# Altium PCB Anchor.PcbDoc
Units mm, origin at the board's own origin, x right, y up, seen from the top; angles counter-clockwise.
Board outline 48 x 36 mm, 2 copper layers (Top Layer, Bottom Layer); 50 components, 36 nets, 187 pads, 45 vias.
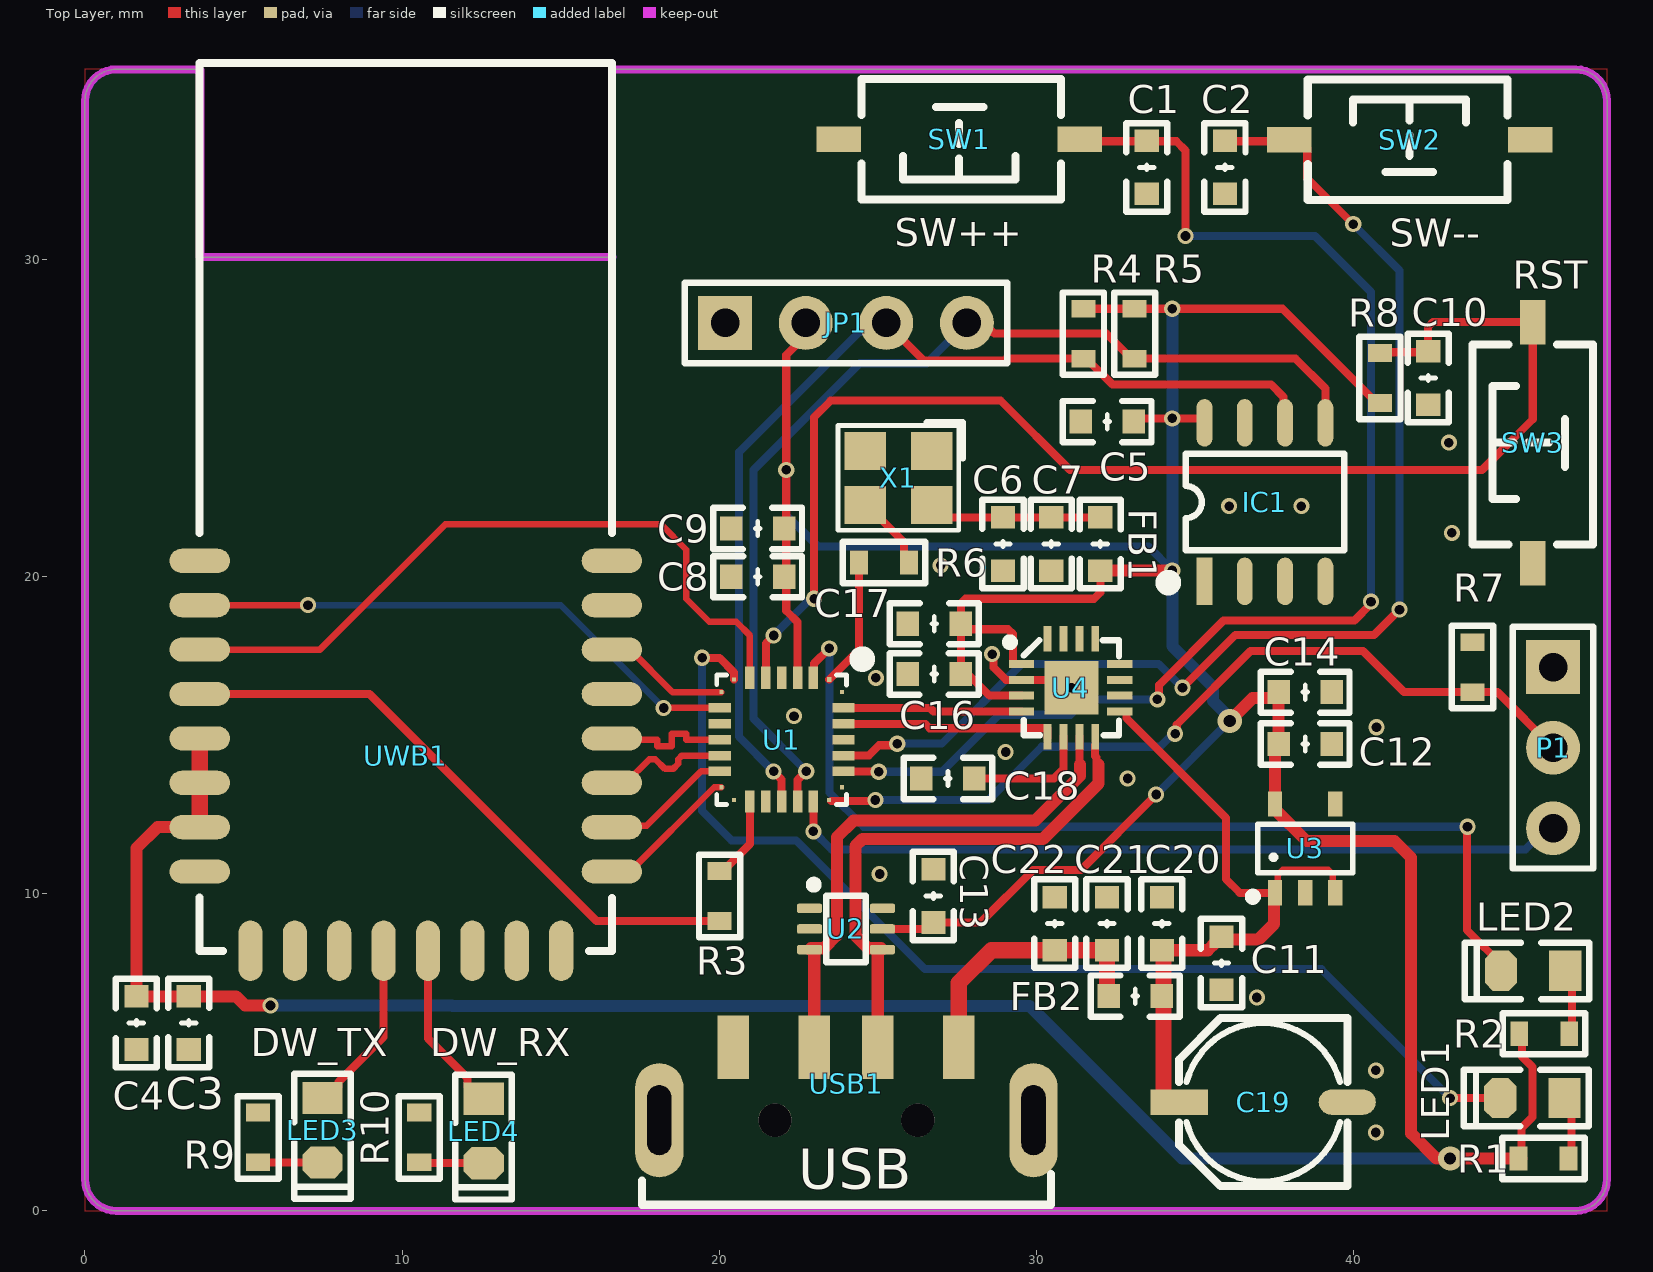
[diagram p0: Top Layer view]
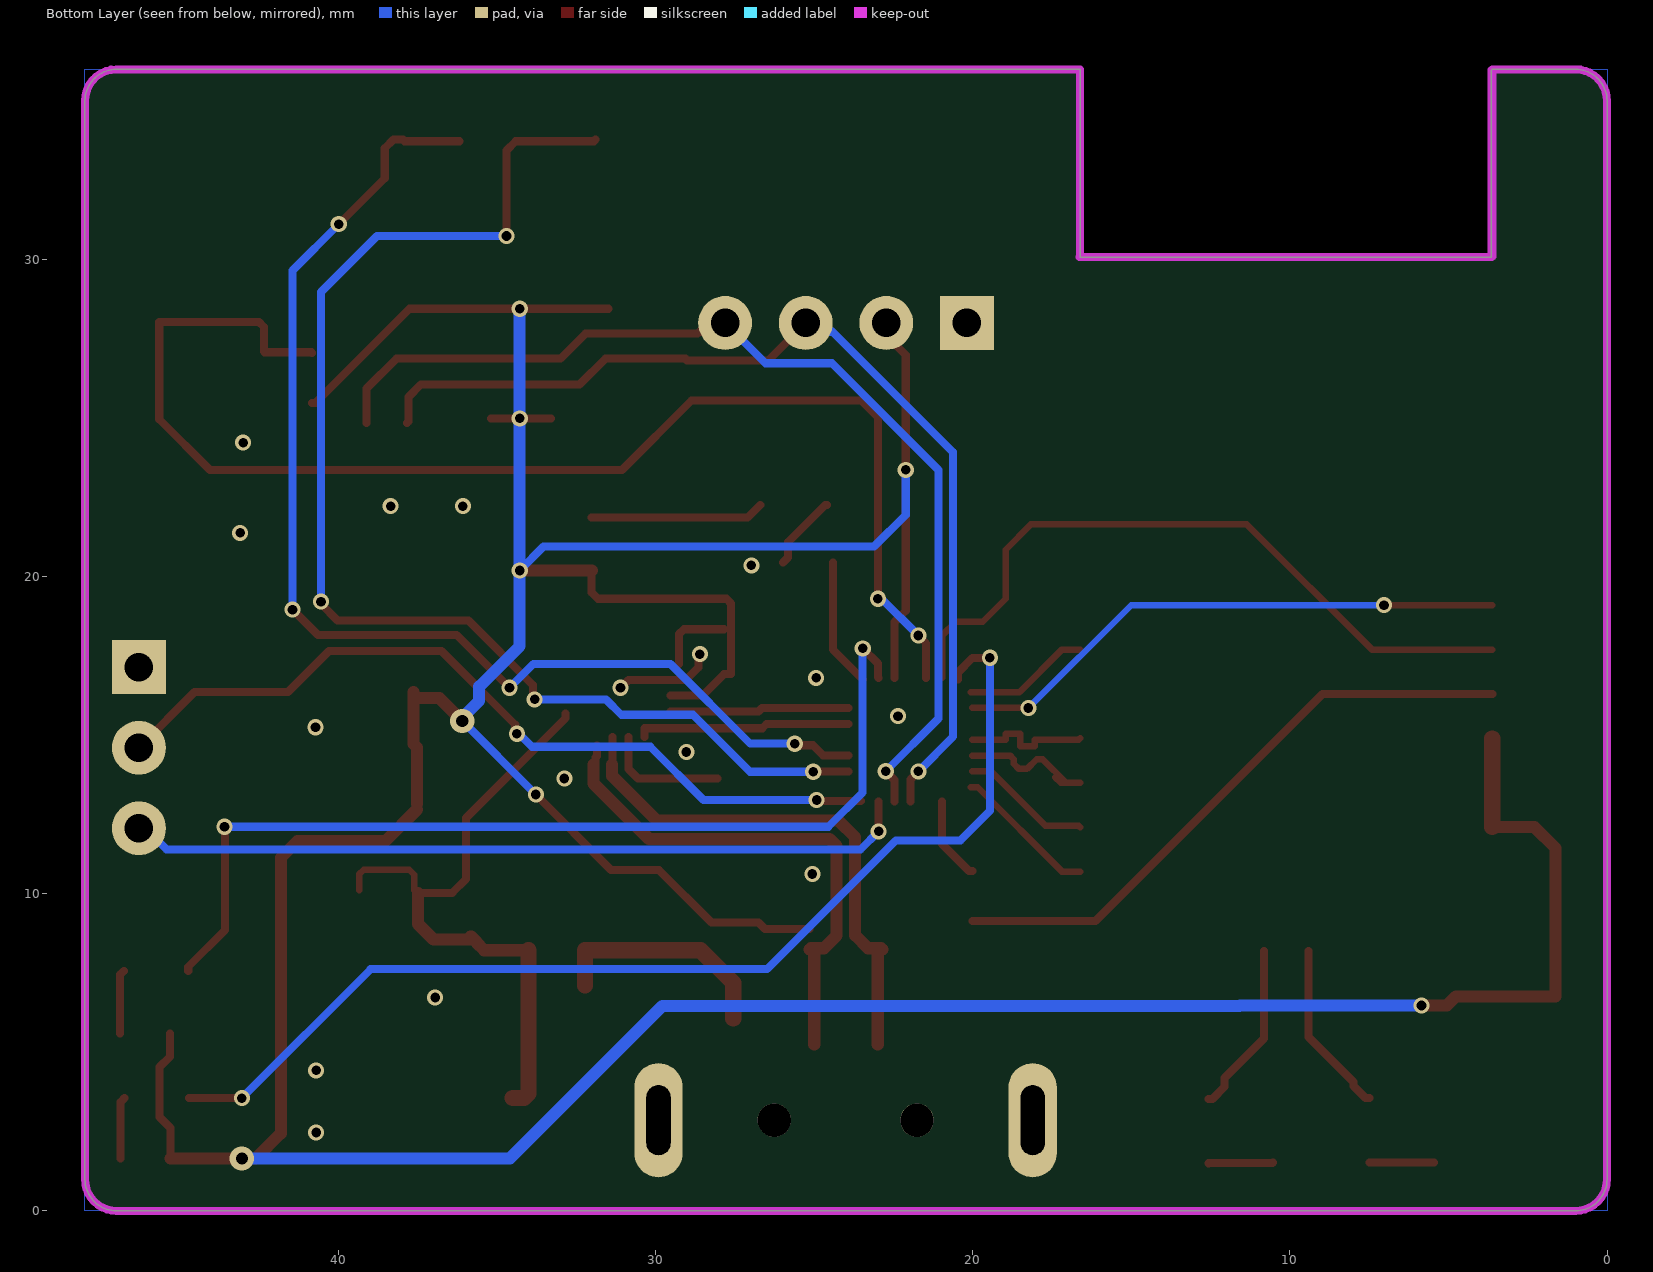
[diagram p1: Bottom Layer view, seen from below]

## Layer stack, top to bottom
Top Solder: solder mask 0.0102, Solder Resist, Dk 3.5
Top Layer: signal copper 0.0356
Dielectric 1: dielectric 0.32, FR-4, Dk 4.8
Bottom Layer: signal copper 0.0356
Bottom Solder: solder mask 0.0102, Solder Resist, Dk 3.5

## Board outline
0,1 0,35 cw(c1,35) 1,36 3.619,36 3.645,35.974 3.645,30.077 16.619,30.077 16.619,36 47,36 cw(c47,35) 48,35 48,1 cw(c47,1) 47,0 1,0 cw(c1,1)

## Design rules (kind name [scope] priority, off if disabled: settings)
AssemblyTestPointUsage [All] p0: scope1count=1 scope1_0_kind=Board scope1_0_value=Board scope2count=1 scope2_0_kind=Board scope2_0_value=Board commentlength=0
AssemblyTestpoint [All] p0: scope1count=1 scope1_0_kind=Board scope1_0_value=Board scope2count=1 scope2_0_kind=Board scope2_0_value=Board commentlength=0
Clearance [All] p0: scope1count=1 scope1_0_kind=Board scope1_0_value=Board scope2count=1 scope2_0_kind=Board scope2_0_value=Board commentlength=0 gap=0.203
Clearance Frame_Shrink [All] p0 off: scope1count=1 scope1_0_kind=Layer scope1_0_value=TOP scope2count=1 scope2_0_kind=Board scope2_0_value=Board commentlength=48 gap=0.381 // Protel DXP Scope 2 Expression Was: InPolygon
Clearance Chip_Pin [All] p0: scope1count=1 scope1_0_kind=Component scope1_0_value=BK1','USBC1','U1 scope2count=1 scope2_0_kind=Board scope2_0_value=Board commentlength=0 gap=0.152
Clearance RF_Pour_Clearance [All] p0 off: scope1count=1 scope1_0_kind=NetClass scope1_0_value=RF scope2count=1 scope2_0_kind=Board scope2_0_value=Board commentlength=48 gap=0.381 // Protel DXP Scope 2 Expression Was: InPolygon
Clearance RF_Pour_Clearance [InNetClass('RF') vs InPolygon] p1: gap=0.381 ignorepadtopadclearanceinfootprint=TRUE
Clearance Chip_Pin [InComponent('BK1','USBC1','U1')] p2: gap=0.152 ignorepadtopadclearanceinfootprint=TRUE
Clearance Frame_Shrink [OnLayer('Keep-Out Layer') vs InPolygon] p3: gap=0.381 ignorepadtopadclearanceinfootprint=FALSE
Clearance [All] p4: gap=0.203 ignorepadtopadclearanceinfootprint=TRUE
ComponentClearance [All] p0: scope1count=1 scope1_0_kind=Board scope1_0_value=Board scope2count=1 scope2_0_kind=Board scope2_0_value=Board commentlength=0 gap=0.254 collisioncheckmode=3
DiffPairsRouting [All] p0: scope1count=1 scope1_0_kind=Board scope1_0_value=Board scope2count=1 scope2_0_kind=Board scope2_0_value=Board commentlength=0
DiffPairsRouting [All] p1: maxlimit=0.254 minlimit=0.254 mostfreqgap=0.254 toplayer_minwidth=0.203 toplayer_maxwidth=0.381 toplayer_prefwidth=0.203 bottomlayer_minwidth=0.203 bottomlayer_maxwidth=0.381 bottomlayer_prefwidth=0.203 maxuncoupledlength=12.7
FabricationTestPointUsage [All] p0: scope1count=1 scope1_0_kind=Board scope1_0_value=Board scope2count=1 scope2_0_kind=Board scope2_0_value=Board commentlength=0 valid=0 allowmultiple=FALSE
FabricationTestpoint [All] p0: scope1count=1 scope1_0_kind=Board scope1_0_value=Board scope2count=1 scope2_0_kind=Board scope2_0_value=Board commentlength=0 side=3 testpointundercomponent=TRUE minsize=1.016 maxsize=2.54 preferedsize=1.524 minholesize=0 maxholesize=1.016 preferedholesize=0.813 testpointgrid=0.025
FanoutControl Fanout_Default [All] p0: scope1count=1 scope1_0_kind=Board scope1_0_value=Board scope2count=1 scope2_0_kind=Board scope2_0_value=Board commentlength=30 // Fanout_Default (Default Rule)
FanoutControl Fanout_Small [All] p0 off: scope1count=1 scope1_0_kind=Board scope1_0_value=Board scope2count=1 scope2_0_kind=Board scope2_0_value=Board commentlength=84 // Protel DXP Scope 1 Expression Was: (CompPinCount < 5)   Fanout_Small (Default Rule)
FanoutControl Fanout_SOIC [All] p0 off: scope1count=1 scope1_0_kind=Board scope1_0_value=Board scope2count=1 scope2_0_kind=Board scope2_0_value=Board commentlength=71 // Protel DXP Scope 1 Expression Was: IsSOIC   Fanout_SOIC (Default Rule)
FanoutControl Fanout_LCC [All] p0 off: scope1count=1 scope1_0_kind=Board scope1_0_value=Board scope2count=1 scope2_0_kind=Board scope2_0_value=Board commentlength=69 // Protel DXP Scope 1 Expression Was: IsLCC   Fanout_LCC (Default Rule)
FanoutControl Fanout_BGA [All] p0 off: scope1count=1 scope1_0_kind=Board scope1_0_value=Board scope2count=1 scope2_0_kind=Board scope2_0_value=Board commentlength=69 // Protel DXP Scope 1 Expression Was: IsBGA   Fanout_BGA (Default Rule)
Height [All] p0: scope1count=1 scope1_0_kind=Board scope1_0_value=Board scope2count=1 scope2_0_kind=Board scope2_0_value=Board commentlength=0
HoleSize [All] p0: scope1count=1 scope1_0_kind=Board scope1_0_value=Board scope2count=1 scope2_0_kind=Board scope2_0_value=Board commentlength=0 absolutevalues=TRUE maxlimit=2.54 minlimit=0.025 maxpercent=80.000 minpercent=20.000
HoleToHoleClearance [All] p0: scope1count=1 scope1_0_kind=Board scope1_0_value=Board scope2count=1 scope2_0_kind=Board scope2_0_value=Board commentlength=0
LayerPairs [All] p0: scope1count=1 scope1_0_kind=Board scope1_0_value=Board scope2count=1 scope2_0_kind=Board scope2_0_value=Board commentlength=0 enforce=TRUE
MatchedLengths DiffPair_MatchedLengths [All] p0 off: scope1count=1 scope1_0_kind=Board scope1_0_value=Board scope2count=1 scope2_0_kind=Board scope2_0_value=Board commentlength=64 tolerance=25.4 amplitude=5.08 gap=0.508 style=90-Degree // Protel DXP Scope 1 Expression Was: InDifferentialPair ('UD')
MatchedLengths DiffPair_MatchedLengths [InDifferentialPair ('UD')] p1: tolerance=25.4 checknetsindiffpair=FALSE checkdiffpairvsdiffpair=TRUE checkxsignals=TRUE checkothers=TRUE
MinimumSolderMaskSliver [All] p0: scope1count=1 scope1_0_kind=Board scope1_0_value=Board scope2count=1 scope2_0_kind=Board scope2_0_value=Board commentlength=0
MinimumSolderMaskSliver [All] p1: minsoldermaskwidth=0
NetAntennae [All] p0: scope1count=1 scope1_0_kind=Board scope1_0_value=Board scope2count=1 scope2_0_kind=Board scope2_0_value=Board commentlength=0
PasteMaskExpansion [All] p0: scope1count=1 scope1_0_kind=Board scope1_0_value=Board scope2count=1 scope2_0_kind=Board scope2_0_value=Board commentlength=0 expansion=0
PlaneClearance [All] p0: scope1count=1 scope1_0_kind=Board scope1_0_value=Board scope2count=1 scope2_0_kind=Board scope2_0_value=Board commentlength=0 clearance=0.381
PlaneClearance [All] p1: clearance=0.381
PlaneConnect [All] p0: scope1count=1 scope1_0_kind=Board scope1_0_value=Board scope2count=1 scope2_0_kind=Board scope2_0_value=Board commentlength=0 planeconnectstyle=Direct reliefexpansion=0.508 reliefentries=4 reliefconductorwidth=0.381 reliefairgap=0.254
PlaneConnect [All] p1: planeconnectstyle=Direct reliefexpansion=0.508 reliefentries=4 reliefconductorwidth=0.381 reliefairgap=0.254
PolygonConnect [All] p0: scope1count=1 scope1_0_kind=Board scope1_0_value=Board scope2count=1 scope2_0_kind=Board scope2_0_value=Board commentlength=0 connectstyle=Relief reliefconductorwidth=0.381 reliefentries=4 polygonreliefangle="90 Angle"
PolygonConnect PolygonConnect_RF [All] p0: scope1count=1 scope1_0_kind=ComponentClass scope1_0_value=RF_Comp scope2count=1 scope2_0_kind=Board scope2_0_value=Board commentlength=0 connectstyle=Direct reliefconductorwidth=0.254 reliefentries=4 polygonreliefangle="90 Angle"
PolygonConnect PolygonConnect_RF [InComponentClass('RF_Comp')] p1: connectstyle=Direct reliefconductorwidth=0.254 reliefentries=4 polygonreliefangle="90 Angle" airgapwidth=0.254
PolygonConnect [All] p2: thpad.connectstyle=Relief thpad.reliefconductorwidth=0.381 thpad.reliefentries=4 thpad.polygonreliefangle="90 Angle" thpad.airgapwidth=0.254 smdpad.connectstyle=Relief smdpad.reliefconductorwidth=0.254 smdpad.reliefentries=4 smdpad.polygonreliefangle="90 Angle" smdpad.airgapwidth=0.254 via.connectstyle=Direct via.reliefconductorwidth=0.254 via.reliefentries=4 via.polygonreliefangle="90 Angle" via.airgapwidth=0.254
RoutingCorners [All] p0: scope1count=1 scope1_0_kind=Board scope1_0_value=Board scope2count=1 scope2_0_kind=Board scope2_0_value=Board commentlength=0 cornerstyle=45-Degree minsetback=2.54 maxsetback=2.54
RoutingLayers [All] p0: scope1count=1 scope1_0_kind=Board scope1_0_value=Board scope2count=1 scope2_0_kind=Board scope2_0_value=Board commentlength=0 top layer=Automatic bottom layer=Automatic
RoutingPriority [All] p0: scope1count=1 scope1_0_kind=Board scope1_0_value=Board scope2count=1 scope2_0_kind=Board scope2_0_value=Board commentlength=0
RoutingTopology [All] p0: scope1count=1 scope1_0_kind=Board scope1_0_value=Board scope2count=1 scope2_0_kind=Board scope2_0_value=Board commentlength=0 topology=Shortest
RoutingVias [All] p0: scope1count=1 scope1_0_kind=Board scope1_0_value=Board scope2count=1 scope2_0_kind=Board scope2_0_value=Board commentlength=0 holewidth=0.305 width=0.508 viastyle="Through Hole" minholewidth=0.305 minwidth=0.457 maxholewidth=0.635 maxwidth=1.27
RoutingVias [All] p1: holewidth=0.305 width=0.508 viastyle="Through Hole" minholewidth=0.305 minwidth=0.457 maxholewidth=0.635 maxwidth=1.27
ShortCircuit [All] p0: scope1count=1 scope1_0_kind=Board scope1_0_value=Board scope2count=1 scope2_0_kind=Board scope2_0_value=Board commentlength=0 allowed=FALSE
SilkToBoardRegionClearance [All] p0: scope1count=1 scope1_0_kind=Board scope1_0_value=Board scope2count=1 scope2_0_kind=Board scope2_0_value=Board commentlength=0
SilkToSilkClearance [All] p0: scope1count=1 scope1_0_kind=Board scope1_0_value=Board scope2count=1 scope2_0_kind=Board scope2_0_value=Board commentlength=0
SilkToSilkClearance [All] p1: silktosilkclearance=0
SilkToSolderMaskClearance [All] p0 off: scope1count=1 scope1_0_kind=Board scope1_0_value=Board scope2count=1 scope2_0_kind=Board scope2_0_value=Board commentlength=44 // Protel DXP Scope 1 Expression Was: IsPad
SilkToSolderMaskClearance [IsPad] p1: minsilkscreentomaskgap=0 clearancetoexposedcopper=TRUE
SolderMaskExpansion [All] p0: scope1count=1 scope1_0_kind=Board scope1_0_value=Board scope2count=1 scope2_0_kind=Board scope2_0_value=Board commentlength=0 expansion=0.102
SolderMaskExpansion [All] p1: expansion=0.102 istentingtop=FALSE
UnRoutedNet [All] p0: scope1count=1 scope1_0_kind=Board scope1_0_value=Board scope2count=1 scope2_0_kind=Board scope2_0_value=Board commentlength=0
UnpouredPolygon [All] p0: scope1count=1 scope1_0_kind=Board scope1_0_value=Board scope2count=1 scope2_0_kind=Board scope2_0_value=Board commentlength=0
Width [All] p0: scope1count=1 scope1_0_kind=Board scope1_0_value=Board scope2count=1 scope2_0_kind=Board scope2_0_value=Board commentlength=0 maxlimit=0.762 minlimit=0.203 preferedwidth=0.254
Width PWR [All] p0: scope1count=1 scope1_0_kind=NetClass scope1_0_value=PWR scope2count=1 scope2_0_kind=Board scope2_0_value=Board commentlength=0 maxlimit=1.27 minlimit=0.203 preferedwidth=0.381
Width PWR [InNetClass('PWR')] p1: maxlimit=1.27 minlimit=0.203 preferedwidth=0.381
Width [All] p2: maxlimit=0.762 minlimit=0.203 preferedwidth=0.254
24 further rules are at their usual default settings.

## Classes and differential pairs
net class PWR: 3V3 USB_5V VBUS

## Components (designator, comment, footprint, x,y, rotation, side; value= is the part's Value field where it differs from the comment)
C1 "" "C 0603_L" 33.483,32.906 r90 top
C2 "Cap" "C 0603_L" 35.949,32.906 r90 top
C3 "Cap" "C 0603_L" 3.272,5.927 r90 top
C4 "Cap" "C 0603_L" 1.621,5.927 r270 top
C5 "Cap" "C 0603_L" 32.237,24.889 r0 top
C6 "Cap" "C 0603_L" 28.95,21.03 r90 top
C7 "Cap" "C 0603_L" 30.474,21.03 r90 top
C8 "Cap" "C 0603_L" 21.215,19.997 r0 top
C9 "Cap" "C 0603_L" 21.215,21.521 r180 top
C10 "Cap" "C 0603_L" 42.36,26.264 r90 top
C11 "Cap" "C 0603_L" 35.843,7.813 r270 top
C12 "Cap" "C 0603_L" 38.481,14.725 r0 top
C13 "Cap" "C 0603_L" 26.755,9.931 r270 top
C14 "Cap" "C 0603_L" 38.481,16.358 r0 top
C16 "Cap" "C 0603_L" 26.783,16.929 r180 top
C17 "Cap" "C 0603_L" 26.783,18.517 r0 top
C18 "Cap" "C 0603_L" 27.212,13.635 r0 top
C19 "Cap Pol1" "CM C(5*5.4)" 37.158,3.428 r180 top
C20 "Cap" "C 0603_L" 33.96,9.058 r270 top
C21 "Cap" "C 0603_L" 32.233,9.058 r270 top
C22 "Cap" "C 0603_L" 30.582,9.058 r270 top
FB1 "Ferrite bead" "C 0603_L" 32.019,21.03 r270 top
FB2 "Ferrite bead" "C 0603_L" 33.122,6.772 r180 top
IC1 "24Cxx" SOP8_L 37.211,22.352 r90 top
JP1 "HDR-1X4" HDR2.54-LI-4P 24,28 r0 top
LED1 "黄色" "LED 0805G" 45.644,3.556 r180 top
LED2 "红色" "LED 0805R" 45.667,7.569 r180 top
LED3 "橙色" "LED 0805G" 7.493,2.54 r270 top
LED4 "绿色" "LED 0805G" 12.573,2.517 r270 top
P1 "Header 3" HDR2.54-LI-3P 46.297,14.605 r270 top
R1 "Resistor" "R 0603_L" 45.994,1.651 r180 top
R2 "Resistor" "R 0603_L" 46.017,5.588 r180 top
R3 "Resistor" "R 0603_L" 20.015,9.931 r270 top
R4 "Resistor" "R 0603_L" 31.486,27.662 r270 top
R5 "Resistor" "R 0603_L" 33.103,27.662 r270 top
R6 "Resistor" "R 0603_L" 25.197,20.447 r0 top
R7 "Resistor" "R 0603_L" 43.757,17.145 r90 top
R8 "Resistor" "R 0603_L" 40.836,26.264 r270 top
R9 "Resistor" "R 0603_L" 5.461,2.317 r90 top
R10 "Resistor" "R 0603_L" 10.541,2.317 r90 top
SW1 "3x6x5" "TSW SMD-3*6*2.5" 27.57,33.792 r180 top
SW2 "3x6x5" "TSW SMD-3*6*2.5" 41.773,33.782 r0 top
SW3 "3x6x5" "TSW SMD-3*6*2.5" 45.657,24.227 r90 top
U1 "STM32G071GBU6" UFQFPN-28 21.971,14.859 r270 top
U2 "CH412K" SOT-363 24,8.89 r270 top
U3 "RT9013" SOT23-5L 38.481,11.43 r0 top
U4 "CH343P" QFN16 31.109,16.496 r0 top
USB1 "USB" USB_A/P_B 24,2.86 r0 top
UWB1 "UWB-X3" UWB-X3-MAX-IPEX 3.619,8.2 r270 top
X1 "XTAL" "OSC 3225-4P" 25.654,23.114 r180 top

## Footprints (in the part's own frame and the unit in brackets; to place one, negate y for a bottom-side part, rotate by r counter-clockwise, add the part's x,y. Pads: shape width x height; smd on the part's side, far side on the other; paste and mask are expansions set on the pad)
"C 0603_L" [mil] "无极性贴片电容                                       淘宝ID:黄晶宝石"
  rect 28x30 smd: 1(-33,0) 2(33,0)
  silkscreen extent -55,-26 55,26
"CM C(5*5.4)" [mm] "贴片电解电容，直径5mm，高5.4mm            淘宝ID:黄晶宝石"
  rect 1.8x0.8 smd: 1(2.65,0)
  oval 1.8x0.8 smd: 2(-2.65,0)
  silkscreen extent -2.65,-2.65 2.65,2.65
HDR2.54-LI-3P [mm] "排针，3脚"
  rect 1.7x1.7 hole 0.9: 1(-2.54,0)
  round 1.7 hole 0.9: 2(0,0) 3(2.54,0)
  silkscreen extent -3.81,-1.27 3.81,1.27
HDR2.54-LI-4P [mm] "排针，4脚"
  rect 1.7x1.7 hole 0.9: 1(-3.81,0)
  round 1.7 hole 0.9: 2(-1.27,0) 3(1.27,0) 4(3.81,0)
  silkscreen extent -5.08,-1.27 5.08,1.27
"LED 0805G" [mil] "绿色0805LED                              淘宝ID:黄晶宝石"
  rect 40x50 smd: 1(-40,0)
  oct 40x50 smd: 2(40,0)
  silkscreen extent -70,-35 85,35
"LED 0805R" [mil] "红色0805LED                                       淘宝ID:黄晶宝石"
  rect 40x50 smd: 1(-40,0)
  oct 40x50 smd: 2(40,0)
  silkscreen extent -70,-35 85,35
"OSC 3225-4P" [mm] "3.2*2.5*0.7mm(长宽高)                         淘宝ID:黄晶宝石"
  rect 1.3x1.2 smd: 1(-1.05,-0.85) 2(1.05,-0.85) 3(1.05,0.85) 4(-1.05,0.85)
  silkscreen extent -2.03,-1.75 1.91,1.65
QFN16 [mm] "3mm*3mm 封装库来自淘宝卖家 ID：黄晶宝石"
  rect 1.7x1.7 smd: 0(0,0)
  rect 0.8x0.25 smd: 1(-1.575,0.75) 2(-1.575,0.25) 3(-1.575,-0.25) 4(-1.575,-0.75) 9(1.524,-0.75) 10(1.524,-0.25) 11(1.524,0.25) 12(1.524,0.75)
  rect 0.25x0.8 smd: 5(-0.75,-1.55) 6(-0.25,-1.55) 7(0.25,-1.55) 8(0.75,-1.55) 13(0.75,1.55) 14(0.25,1.55) 15(-0.25,1.55) 16(-0.75,1.55)
  silkscreen extent -2.07,-1.5 1.5,1.56
"R 0603_L" [mil] "1/10W贴片电阻                 淘宝ID:黄晶宝石"
  rect 22x30 smd: 1(-31,0) 2(31,0)
  silkscreen extent -51,-26 51,26
SOP8_L [mm] "5*6*1.8mm（长宽高）封装库来自淘宝卖家 ID：黄晶宝石"
  rect 1.5x0.5 smd: 1(-2.5,1.905)
  oval 1.5x0.5 smd: 2(-2.5,0.635) 3(-2.5,-0.635) 4(-2.5,-1.905) 5(2.5,-1.905) 6(2.5,-0.635) 7(2.5,0.635) 8(2.5,1.905)
  silkscreen extent -2.69,-2.5 1.52,3.2
SOT23-5L [mm] "3x1.6x1.1mm(长宽高) 封装库来自淘宝卖家 ID：黄晶宝石"
  rect 0.45x0.8 smd: 1(-0.95,-1.4) 2(0,-1.4) 3(0.95,-1.4) 4(0.95,1.4) 5(-0.95,1.4)
  silkscreen extent -1.78,-1.65 1.5,0.76
SOT-363 [mm]
  rrect50% 0.3x0.8 smd: 1(-0.65,-1.15) 2(0,-1.15) 3(0.65,-1.15) 4(0.65,1.15) 5(0,1.15) 6(-0.65,1.15)
  silkscreen extent -1.52,-1.14 1.05,0.63
"TSW SMD-3*6*2.5" [mm] "3*6*2.5mm"
  rect 1.4x0.8 smd: 1(-3.8,0) 2(3.8,0)
  silkscreen extent -3.21,-1.9 3.09,1.9
UFQFPN-28 [mm]
  rect 0.152x0.152 smd paste-0.064 mask+0: 1(-1.9,1.5)
  rect 0.7x0.3 smd: 2(-1.95,1) 3(-1.95,0.5) 4(-1.95,0) 5(-1.95,-0.5) 6(-1.95,-1) 16(1.95,-1) 17(1.95,-0.5) 18(1.95,0) 19(1.95,0.5) 20(1.95,1)
  rect 0.127x0.127 smd paste-0.064 mask+0: 7(-1.9,-1.5) 8(-1.5,-1.9) 14(1.5,-1.9) 15(1.9,-1.5) 21(1.9,1.5) 22(1.5,1.9) 28(-1.5,1.9)
  rect 0.3x0.7 smd: 9(-1,-1.95) 10(-0.5,-1.95) 11(0,-1.95) 12(0.5,-1.95) 13(1,-1.95) 23(1,1.95) 24(0.5,1.95) 25(0,1.95) 26(-0.5,1.95) 27(-1,1.95)
  silkscreen extent -2.74,-2.04 2.04,2.74
USB_A/P_B [mm] "A型USB 插头，20*13*4.5mm"
  round 1.05 hole 1.05: 0(-2.237,0) 0(2.263,0)
  rect 1x2 smd: 1(3.556,2.3) 2(1,2.3) 3(-1,2.3) 4(-3.556,2.3)
  oval 1.524x3.6 hole 0.762 slot 2.2 at 90 deg: 4(-5.887,0) 4(5.913,0)
  silkscreen extent -6.44,-2.67 6.46,-1.7
UWB-X3-MAX-IPEX [mil]
  oval 30x75 smd: 1(-484.25,0) 2(-429.13,0) 3(-374.02,0) 4(-318.9,0) 5(-263.78,0) 6(-208.66,0) 7(-153.54,0) 8(-98.43,0) 17(-98.43,511.81) 18(-153.54,511.81) 19(-208.66,511.81) 20(-263.78,511.81) 21(-318.9,511.81) 22(-374.02,511.81) 23(-429.13,511.81) 24(-484.25,511.81)
  oval 75x30 smd: 9(0,62.99) 10(0,118.11) 11(0,173.23) 12(0,228.35) 13(0,283.46) 14(0,338.58) 15(0,393.7) 16(0,448.82)
  silkscreen extent -1102,0 0,512

## Part data
C1: library part Cap, "Capacitor"
C2 C3 C4 C5 C6 C7 C8 C9 C10 C11 C12 C13 C14 C16 C17 C18 C20 C21 C22: "Capacitor"
C19: "Polarized Capacitor (Radial)"
FB1 FB2: "铁氧体磁珠"
IC1: "外置EEPROM"
JP1: library part "Header 4", "4P接插件"
LED1 LED2 LED3 LED4: library part LED-SMD, "贴片LED"
P1: "Header, 3-Pin"
SW1 SW2 SW3: library part "TSW 3x6", "3x6轻触开关"
U1: "No Description Available"
U2: "四路ESD保护"
U3: "LDO"
U4: library part CH343, "USB转串口"
USB1: library part USB-A/P, "USB-A型公接口"
UWB1: library part UWB-X3(DWM3000)
X1: "4脚有源晶振"

## Via types
v1: diameter 0.508, hole 0.305, Top Layer to Bottom Layer, tented both sides, 43 vias
v2: diameter 0.762, hole 0.381, Top Layer to Bottom Layer, tented both sides, 2 vias

## Nets (pads, with @x,y where several pads share a name; then routed paths per layer and width w, separated by ;. In a path a pad name is that pad's centre, name@x,y a point inside that pad or via, vN(x,y) a via of type N, cw(c..) or ccw(c..) an arc to the next point about the centre after c; other vN are vias at no path point)
3V3: C3.2 C4.1 C5.2 C8.2 C9.1 C12.1 C13.2 C14.1 C16.1 C17.2 FB1.2 IC1.8 JP1.2 R1.2 R2.2 R4.1 R5.1 R8.2 U1.3 U2.5 U3.5 U4.1 U4.3 UWB1.5 UWB1.6 UWB1.7 | length 160.4
  Top Layer w0.254: U1.3 22.471,18.569 22.116,18.924 v1(22.116,23.367) 22.116,26.995 22.73,27.609 JP1.2 ; U2.5 26.552,8.89 C13.2 28.243,9.093 29.903,10.754 31.406,10.754 v1(33.782,13.13) ; C17.2@27.85,18.342 29.112,18.342 29.261,18.193 U4.1@29.261,17.248 ; U4.3 28.525,16.246 27.842,16.929 C16.1 27.622,19.155 27.77,19.304 31.819,19.304 32.019,19.504 FB1.2 ; R4.1 R5.1 v1(34.29,28.449) 37.762,28.449 40.735,25.476 R8.2 ; C5.2@33.303,24.99 v1(34.29,24.99) IC1.8@35.192,24.99 ; U3.5@37.531,12.655 U3.5 ; C12.1@37.531,14.613 C12.1 ; R1.2@45.298,1.651 45.298,2.611 45.646,2.959 45.646,4.534 45.321,4.859 R2.2@45.321,5.588
  Top Layer w0.381: UWB1.7 2.286,12.1 1.621,11.435 C4.1 C3.2 4.761,6.766 5.052,6.475 v1(5.851,6.475) ; FB1.2 v1(34.29,20.192) ; v2(36.101,15.449) 36.819,16.167 C14.1@37.478,16.167 ; U3.5@37.531,12.655 38.518,11.668 41.292,11.668 41.823,11.136 41.823,2.445 42.617,1.651 v2(43.053,1.651) R1.2@45.298,1.651 ; U3.5 C12.1@37.531,14.613 ; C12.1 C14.1
  Top Layer w0.508: UWB1.7 UWB1.6 UWB1.5
  Bottom Layer w0.254: v1(22.116,23.367) 22.116,21.947 23.116,20.947 33.535,20.947 v1(34.29,20.192) ; v1(33.782,13.13) v2@36.144,15.492
  Bottom Layer w0.381: v1(5.851,6.475) 11.574,6.475 11.586,6.462 29.79,6.462 34.601,1.651 v2(43.053,1.651) ; v1(34.29,28.449) v1(34.29,24.99) v1(34.29,20.192) 34.29,17.809 35.567,16.532 35.567,16.087 v2@36.101,15.552
D_DATA_N: U2.4 U4.8 USB1.2 | length 16.7
  Top Layer w0.203: U2.4@25,8.192 25.048,8.24 U2.4
  Top Layer w0.254: U4.8@31.858,14.673 31.858,14.339 31.895,14.302 31.895,14.139 31.962,14.072
  Top Layer w0.381: USB1.2@25,5.25 U2.4@25,8.192 ; U2.4 25.11,8.28 24.697,8.28 24.296,8.681 24.296,11.504 24.519,11.727 30.214,11.727 31.962,13.475 31.962,14.072
D_DATA_P: U2.3 U4.7 USB1.3 | length 17
  Top Layer w0.203: U2.3 U2.3@22.952,8.24 ; U2.3@23,8.192 U2.3@22.952,8.24 ; U2.3@23,8.24 U2.3@22.952,8.24
  Top Layer w0.254: U4.7 31.359,14.091 31.378,14.072
  Top Layer w0.381: U2.3 22.891,8.28 23.303,8.28 23.712,8.689 23.712,11.781 24.242,12.311 29.972,12.311 31.378,13.717 31.378,14.072 ; USB1.3@23,5.25 U2.3@23,8.192
DW_IRQn: U1.8 UWB1.22 | length 4
  Top Layer w0.203: UWB1.22 17.19,17.7 18.531,16.359 U1.8
DW_MISO: U1.12 UWB1.19 | length 4.5
  Top Layer w0.203: UWB1.19 UWB1.19@17.056,13.5 ; UWB1.19@17.398,13.669 17.23,13.5 UWB1.19@17.056,13.5 ; U1.12 18.827,14.359 18.708,14.24 18.708,14.096 18.547,13.935 18.295,13.935 17.984,14.246 17.802,14.246 UWB1.19@17.056,13.5
DW_MOSI: U1.13 UWB1.18 | length 4.1
  Top Layer w0.203: UWB1.18 16.661,12.142 17.712,12.142 19.429,13.859 U1.13
DW_NSS: U1.14 UWB1.17 | length 4.6
  Top Layer w0.203: UWB1.17 17.19,10.7 19.849,13.359 U1.14
DW_RESET: U1.6 UWB1.3 | length 22.7
  Top Layer w0.203: UWB1.3 7.413,17.7 11.361,21.648 18.17,21.648 18.965,20.853 18.965,19.304 19.688,18.581 20.535,18.581 20.971,18.145 U1.6
DW_SCK: U1.11 UWB1.20 | length 4.2
  Top Layer w0.203: UWB1.20 16.66,14.859 17.492,14.859 18.051,14.859 18.051,14.653 18.508,14.653 18.508,15.046 18.965,15.046 18.965,14.859 19.583,14.859 U1.11
DW_WUP: U1.9 UWB1.2 | length 17.7
  Top Layer w0.203: UWB1.2 v1(7.035,19.1) ; v1(18.25,15.859) U1.9
  Bottom Layer w0.203: v1(7.035,19.1) 15.009,19.1 v1(18.25,15.859)
GND: C1.1 C2.1 C3.1 C4.2 C5.1 C6.1 C7.1 C8.1 C9.2 C10.1 C11.2 C12.2 C13.1 C14.2 C16.2 C17.1 C18.1 C19.2 C20.1 C21.1 C22.1 IC1.1 IC1.2 IC1.3 IC1.4 JP1.1 P1.1 R7.2 R9.2 R10.2 SW1.2 SW2.2 SW3.1 U1.4 U2.2 U3.2 U4.0 U4.2 USB1.4 UWB1.8 UWB1.16 UWB1.21 UWB1.23 UWB1.24 X1.2 | length 3.2
  Top Layer w0.254: v1(28.609,17.557) 28.658,17.508 28.658,17.131 29.04,16.748 29.532,16.748 U4.2 30.859,16.746 v1(31.109,16.496)
  other v1: 40.71,2.471 40.709,4.43 36.957,6.731 25.062,10.625 32.883,13.635 29.034,14.473 40.729,15.252 22.358,15.6 24.942,16.809 26.983,20.358 43.107,21.381 36.082,22.224 38.36,22.224 43.01,24.227
LED1: LED1.2 U1.7 | length 35.3
  Top Layer w0.254: v1(19.462,17.441) 20.007,17.441 20.471,16.977 U1.7 ; v1(43.053,3.556) LED1.2@44.719,3.556
  Bottom Layer w0.254: v1(19.462,17.441) 19.462,12.618 20.394,11.686 22.426,11.686 26.491,7.621 38.988,7.621 v1(43.053,3.556)
LED2: LED2.2 U1.2 | length 31.3
  Top Layer w0.254: U1.2 22.994,16.832 22.994,17.26 v1(23.473,17.74) ; v1(43.599,12.114) 43.576,12.091 43.576,8.862 44.742,7.696 LED2.2@44.742,7.569
  Bottom Layer w0.254: v1(23.473,17.74) 23.473,13.198 24.558,12.114 v1(43.599,12.114)
MCU_RX: U1.27 U4.4 | length 5.7
  Top Layer w0.254: U1.27 26.647,15.859 26.76,15.746 U4.4
MCU_TX: U1.26 U4.5 | length 6.8
  Top Layer w0.254: U1.26 26.501,15.359 26.64,15.219 30.357,15.219 30.359,15.217 U4.5
NetC1_2: C1.2 SW1.1 U1.23 | length 41.1
  Top Layer w0.254: U1.23 23.927,13.853 25.027,13.853 v1(25.033,13.847) ; SW1.1@31.898,33.782 31.949,33.731 33.737,33.731 34.416,33.731 34.706,33.442 v1(34.706,30.743) ; v1(33.818,16.129) 33.866,16.178 33.866,16.577 35.907,18.618 40.031,18.618 40.557,19.144 v1(40.557,19.213)
  Bottom Layer w0.254: v1(25.033,13.847) 27.027,13.847 28.826,15.646 31.085,15.646 31.568,16.129 v1(33.818,16.129) ; v1(34.706,30.743) 38.786,30.743 40.557,28.972 v1(40.557,19.213)
NetC2_2: C2.2 SW2.1 U1.24 | length 38.3
  Top Layer w0.254: U1.24 24.719,14.359 25.043,14.683 25.566,14.683 v1(25.615,14.732) ; v1(34.611,16.496) 36.276,18.161 40.655,18.161 v1(41.453,18.959) ; C2.2@36.195,33.731 37.922,33.731 SW2.1 38.273,33.782 38.546,33.509 38.546,32.564 v1(39.995,31.115)
  Bottom Layer w0.254: v1(25.615,14.732) 27.02,14.732 29.534,17.246 33.861,17.246 v1(34.611,16.496) ; v1(39.995,31.115) 41.453,29.657 v1(41.453,18.959)
NetC6_2: C6.2 C7.2 FB1.1 X1.4 | length 5.5
  Top Layer w0.254: X1.4 27.1,21.868 C6.2 C7.2 FB1.1
NetC18_2: C18.2 U4.6 | length 3.9
  Top Layer w0.254: C18.2 30.559,13.635 30.857,13.933 U4.6 U4.6
NetLED1_1: LED1.1 R1.1 | length 2
  Top Layer w0.254: LED1.1@46.751,3.556 46.873,3.435 R1.1@46.873,1.651
NetLED2_1: LED2.1 R2.1 | length 2
  Top Layer w0.254: LED2.1@46.774,7.569 46.896,7.448 R2.1@46.896,5.588
NetLED3_1: LED3.1 UWB1.12 | length 5.5
  Top Layer w0.254: LED3.1 7.62,3.556 8.001,3.937 8.001,4.064 9.419,5.482 UWB1.12
NetLED3_2: LED3.2 R9.1 | length 2
  Top Layer w0.254: R9.1 5.464,1.527 7.49,1.527 LED3.2
NetLED4_1: LED4.1 UWB1.13 | length 5.5
  Top Layer w0.254: UWB1.13 10.819,5.437 12.065,4.191 12.065,3.914 12.446,3.533 LED4.1
NetLED4_2: LED4.2 R10.1 | length 2
  Top Layer w0.254: R10.1 10.555,1.515 12.559,1.515 LED4.2
NetR3_2: R3.2 UWB1.4 | length 19.4
  Top Layer w0.254: UWB1.4 8.973,16.3 16.129,9.144 R3.2
NetR6_1: R6.1 U1.1 | length 4.1
  Top Layer w0.254: U1.1 24.409,17.697 R6.1
NetR6_2: R6.2 X1.3 | length 2.4
  Top Layer w0.254: X1.3 24.654,22.264 25.832,21.086 25.832,20.599 R6.2
PA13: P1.3 U1.20 | length 24.8
  Top Layer w0.254: v1(22.971,11.967) U1.20
  Bottom Layer w0.254: v1(22.971,11.967) 23.536,11.402 45.43,11.402 46.093,12.065 P1.3
PA14: P1.2 R7.1 U1.21 | length 26.1
  Top Layer w0.254: 23.534,12.927 24.893,12.927 v1(24.925,12.959) ; v1(34.381,15.046) 34.43,15.095 34.43,15.329 36.753,17.653 40.306,17.653 41.602,16.358 R7.1 44.545,16.358 P1.2
  Bottom Layer w0.254: v1(24.925,12.959) 28.495,12.959 30.172,14.636 33.902,14.636 34.312,15.046 v1(34.381,15.046)
RESET: C10.2 R8.1 SW3.2 U1.5 | length 42.1
  Top Layer w0.254: U1.5 21.471,17.899 v1(21.717,18.145) ; v1(22.994,19.304) 22.994,25.026 23.517,25.549 28.878,25.549 31.059,23.368 44.061,23.368 45.657,24.964 45.657,27.727 SW3.2 42.509,28.027 42.36,27.879 C10.2 42.335,27.076 40.862,27.076 R8.1
  Bottom Layer w0.254: v1(21.717,18.145) 22.876,19.304 v1(22.994,19.304)
SCK: IC1.6 JP1.3 R4.2 U1.18 | length 32.3
  Top Layer w0.254: v1(21.717,13.859) 21.971,13.605 U1.18 ; JP1.3 26.45,26.82 29.009,26.82 29.064,26.874 R4.2 31.587,26.874 32.401,26.06 37.409,26.06 37.799,25.67 37.799,24.899 IC1.6
  Bottom Layer w0.254: v1(21.717,13.859) 20.623,14.953 20.623,23.925 24.421,27.723 24.993,27.723 JP1.3
SDA: IC1.5 JP1.4 R5.2 U1.19 | length 33.2
  Top Layer w0.254: U1.19 22.471,13.589 v1(22.746,13.864) ; JP1.4 28.087,27.723 28.62,27.723 28.682,27.662 32.214,27.662 33.001,26.874 R5.2 38.175,26.874 39.116,25.933 IC1.5
  Bottom Layer w0.254: v1(22.746,13.864) 21.081,15.529 21.081,23.367 24.444,26.73 26.54,26.73 JP1.4
SYNC: R3.1 U1.16 | length 2.6
  Top Layer w0.254: R3.1 20.117,10.719 20.971,11.573 U1.16
USB_5V: C11.1 C19.1 C20.2 FB2.1 U3.1 U3.3 U4.9 | length 21
  Top Layer w0.203: U3.1@37.615,10.114 37.615,10.602 37.773,10.76 39.208,10.76 39.357,10.611 U3.3@39.357,10.104
  Top Layer w0.254: U4.9@32.843,15.681 32.843,15.537 35.988,12.391 35.988,10.459 36.417,10.03 U3.1@37.497,10.03
  Top Layer w0.381: C20.2@34.011,8.219 35.411,8.219 35.652,8.461 35.652,8.486 35.817,8.651 C11.1 ; C11.1@35.843,8.56 37.007,8.56 37.497,9.049 U3.1@37.497,10.03
  Top Layer w0.508: C20.2@34.011,8.219 34.011,7.112 34.011,3.702 34.157,3.556 C19.1@34.51,3.556
VBUS: C21.2 C22.2 FB2.2 USB1.1 | length 7.3
  Top Layer w0.508: USB1.1@27.556,6.061 27.556,7.187 28.588,8.219 C22.2 C21.2 FB2.2@32.233,7.109
pads on no net: IC1.7 U1.10 U1.15 U1.17 U1.22 U1.25 U1.28 U2.1 U2.6 U3.4 U4.10 U4.11 U4.12 U4.13 U4.14 U4.15 U4.16 USB1.0 UWB1.1 UWB1.9 UWB1.10 UWB1.11 UWB1.14 UWB1.15 X1.1

## Polygon pours and split planes (outlines as drawn)
GND on Bottom Layer "NONET_L02_P-001" (solid, pour order 1): 0,36 0,0 48,0 48,36 16.619,36 16.64,35.979 16.64,30.077 3.645,30.077 3.619,30.103 3.619,36
GND on Top Layer "NONET_L02_P-001" (solid, pour order 0): 0,36 0,0 48,0 48,36 16.619,36 16.64,35.979 16.64,30.077 3.645,30.077 3.619,30.103 3.619,36

## Keep-outs
Keep-Out Layer:
  lines w0.254: 16.619,30.098 16.64,30.077 3.645,30.077 ; 3.619,36 1,36 ccw(c1,35) 0,35 0,1 ccw(c1,1) 1,0 47,0 ccw(c47,1) 48,1 48,35 ccw(c47,35) 47,36 16.619,36 ; 3.619,36 3.645,35.974 3.645,30.077 ; 3.619,36 3.619,30.103 3.645,30.077 ; 3.645,30.077 16.619,30.077 ; 16.619,30.077 16.619,36 ; 16.619,30.077 16.619,30.077 ; 16.619,30.077 16.619,36

## Silkscreen, mask and mechanical layers (free items; w line width, h text height)
Top Overlay:
  text "SW++" at 25.531,30.42 h0.89
  text "SW--" at 41.141,30.404 h0.89
  text "RST" at 45.025,29.083 h0.89
  text "DW_TX" at 5.232,4.873 h0.89
  text "DW_RX" at 10.893,4.873 h0.89
Mechanical 1:
  lines w0.254: 16.619,30.077 16.619,30.077 ; 16.619,30.077 16.619,36 47,36 cw(c47,35) 48,35 48,1 cw(c47,1) 47,0 1,0 cw(c1,1) 0,1 0,35 cw(c1,35) 1,36 3.619,36 3.645,35.974 3.645,30.077 16.619,30.077

## Text inside footprints (layer, text, board x,y; h text height)
U4: Mechanical 1 "Cap" at 33.072,30.083 h0.89